# Altium PCB Power_Board.PcbDoc (part 1 of 3)
Units mil, origin at the board's own origin, x right, y up, seen from the top; angles counter-clockwise.
Board outline 5980 x 2140 mil, 4 copper layers (Top Layer, Layer 1, Layer 2, Bottom Layer), stack 23.756 mil thick; 228 components, 110 nets, 609 pads, 397 vias.
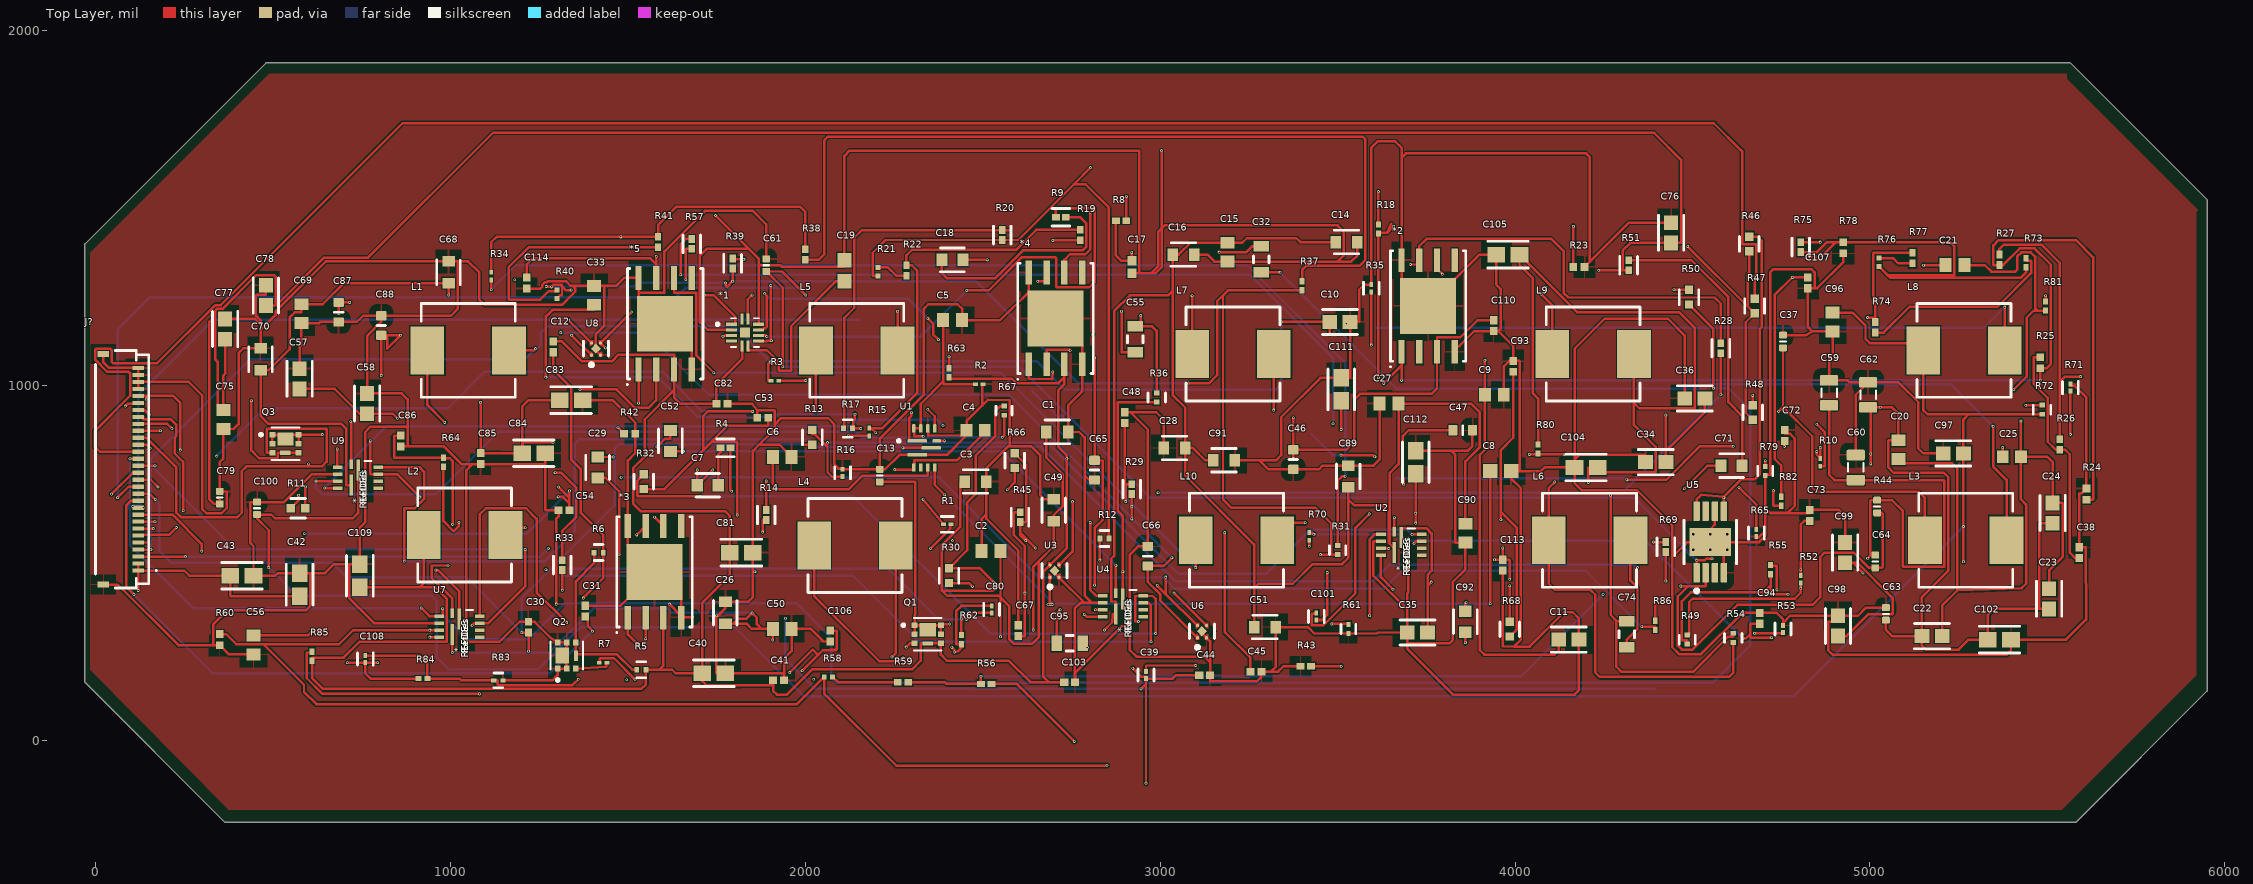
[diagram p0: Top Layer view]
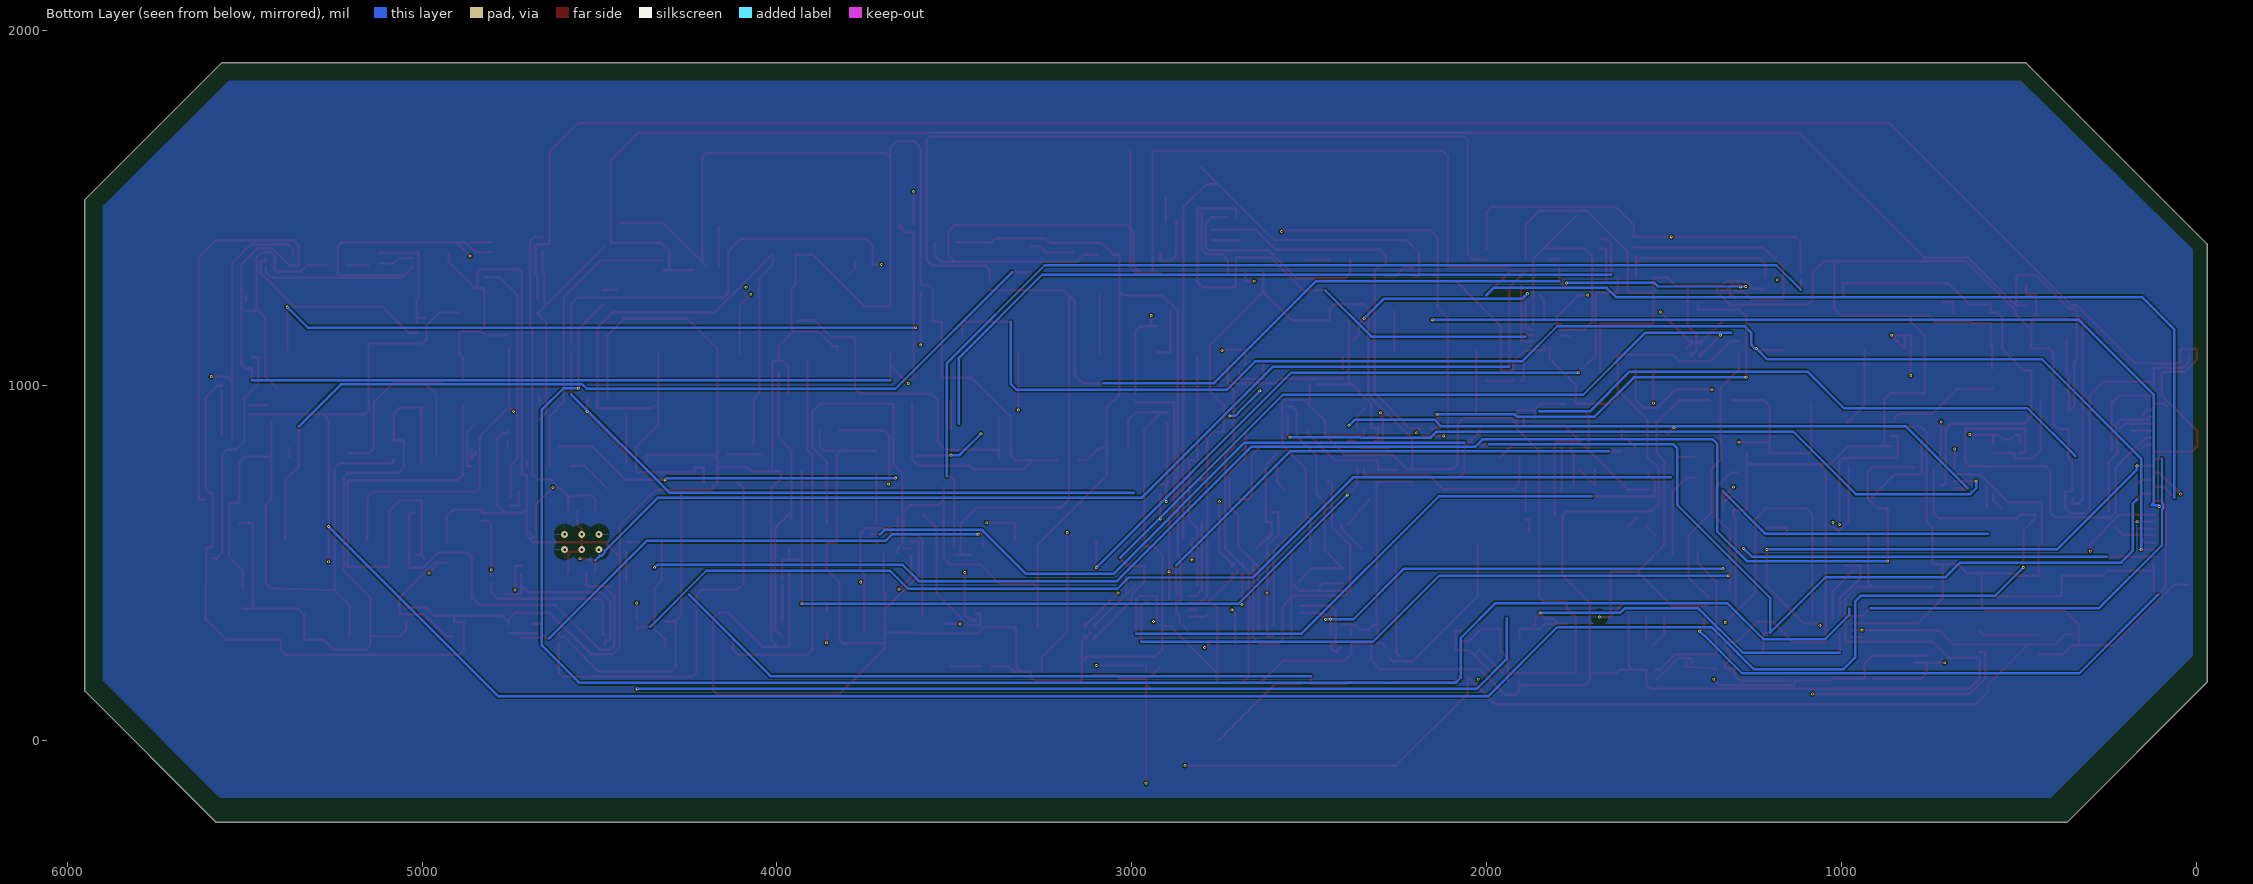
[diagram p1: Bottom Layer view, seen from below]
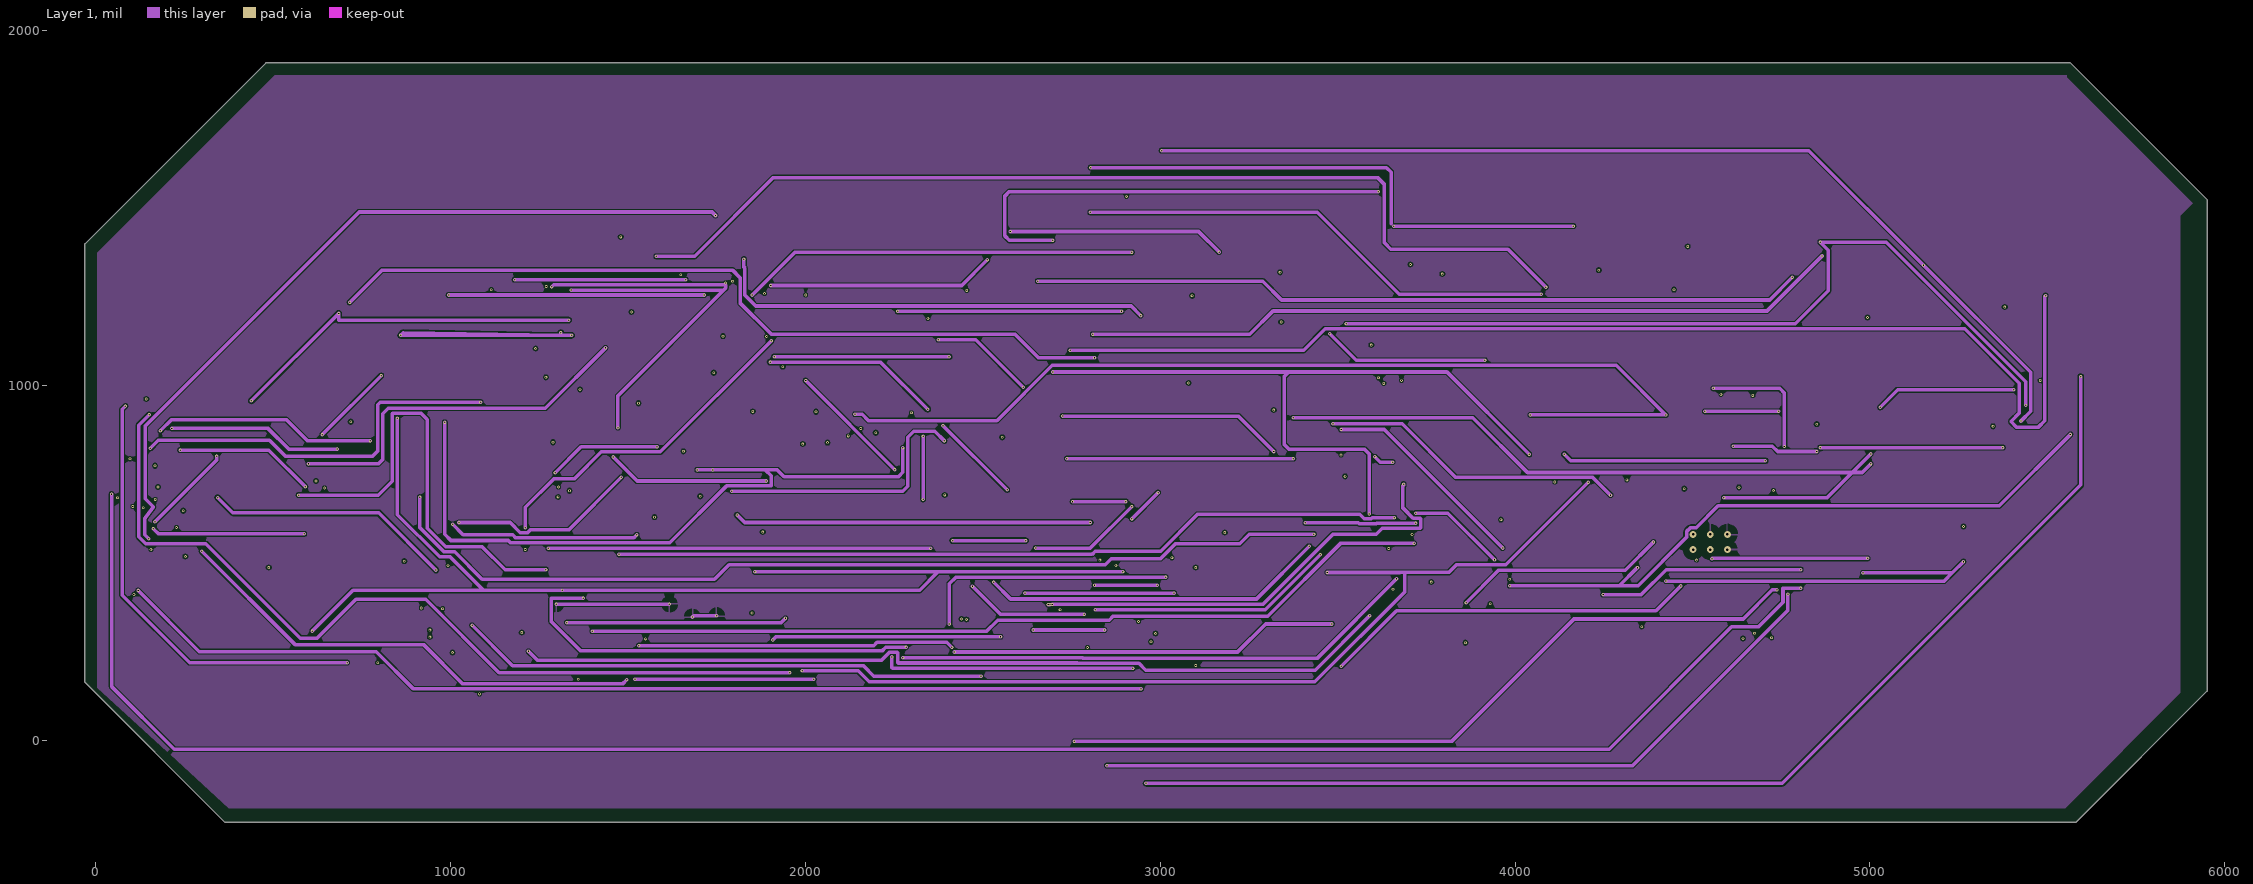
[diagram p2: Layer 1]
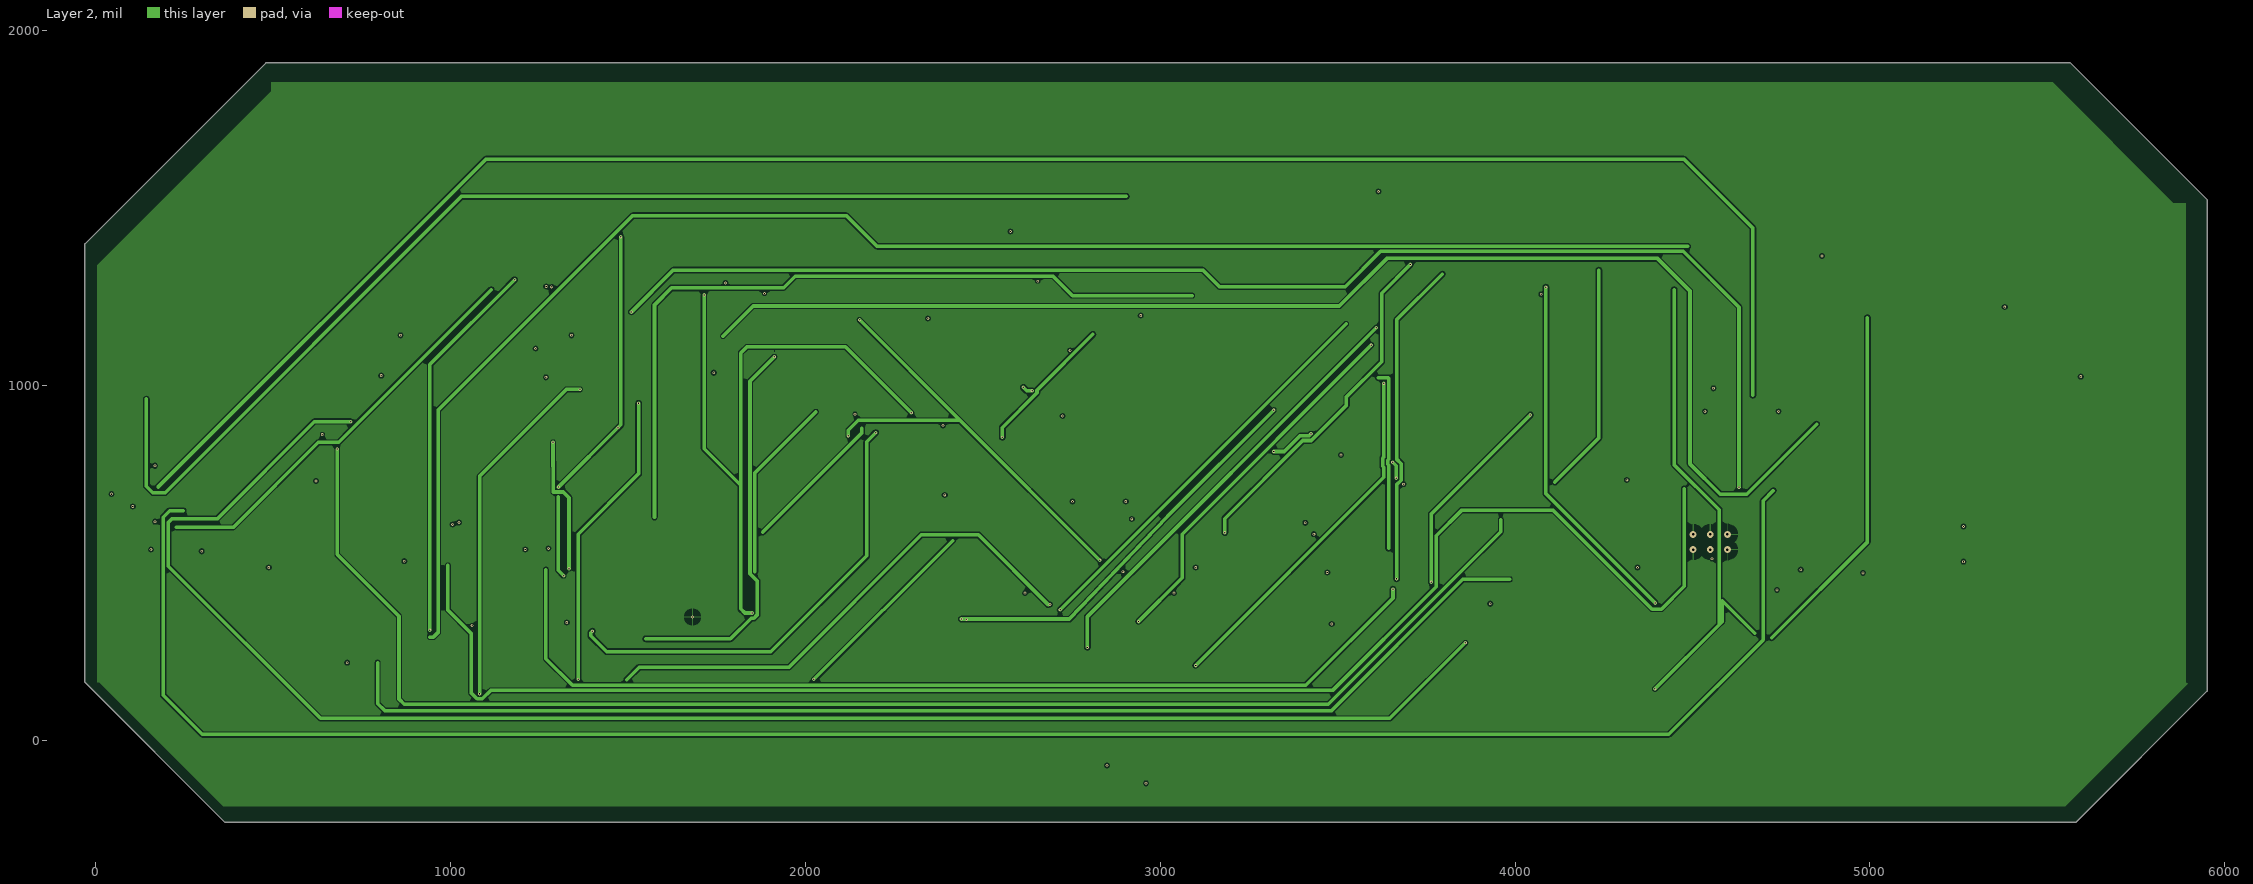
[diagram p3: Layer 2]
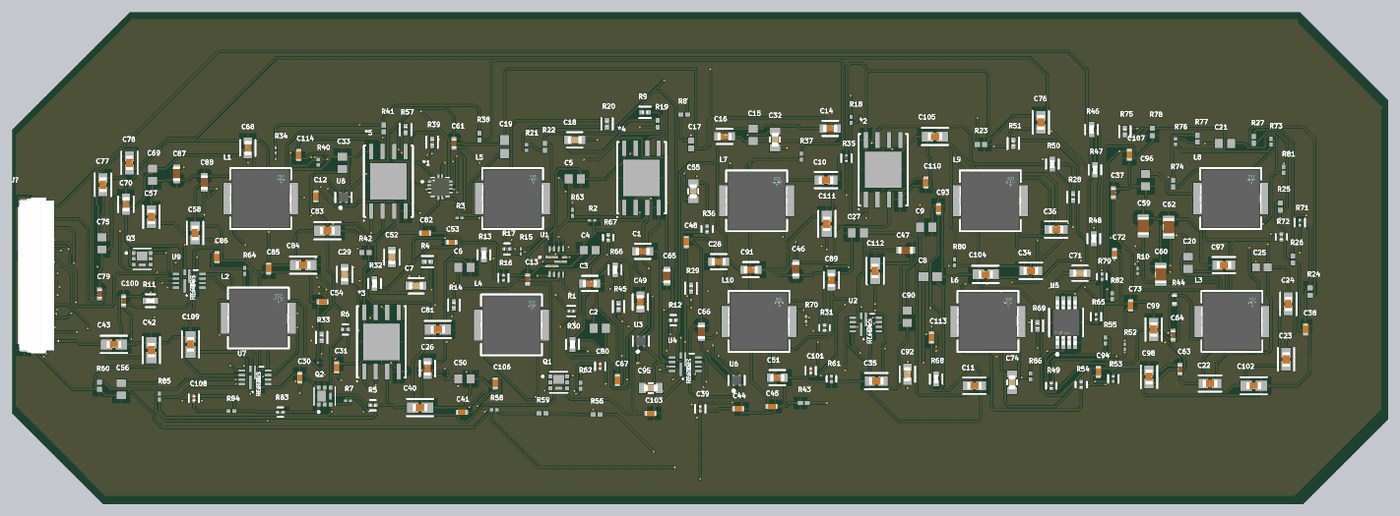
[diagram p6: 3D render of the assembled board from above, using the file's embedded part models]

## Layer stack, top to bottom
Top Solder: solder mask 0.4, Solder Resist, Dk 3.5
Top Layer: signal copper 1.4
Dielectric 2: prepreg 2.8, PP-006, Dk 4.1
Layer 1: signal copper 1.378
Dielectric 1: dielectric 12.6, FR-4, Dk 4.8
Layer 2: signal copper 1.378
Dielectric 3: prepreg 2.8, PP-006, Dk 4.1
Bottom Layer: signal copper 1.4
Bottom Solder: solder mask 0.4, Solder Resist, Dk 3.5

## Board outline
-30,1400 480,1910 5565,1910 5950,1525 5950,140 5580,-230 365,-230 -30,165

## Design rules (kind name [scope] priority, off if disabled: settings)
AssemblyTestPointUsage [All] p1: isadvanced=TRUE
AssemblyTestpoint [All] p1: isadvanced=TRUE testpointundercomponent=TRUE minsize=40 maxsize=100 preferedsize=60 minholesize=0 maxholesize=40 preferedholesize=32 testpointgrid=1 usegrid=TRUE gridtolerance=0.01 allowsidetop=TRUE allowsidebottom=TRUE
Clearance Clearance_3 [All] p1 off: isadvanced=TRUE gap=1 ignorepadtopadclearanceinfootprint=FALSE
Clearance Clearance_1 [(ExistsOnLayer('Layer 1') Or ExistsOnLayer('Layer 2')) vs (ExistsOnLayer('Layer 1') Or ExistsOnLayer('Layer 2'))] p2: gap=3.94 ignorepadtopadclearanceinfootprint=FALSE except(10: Hole-Hole) sourcerule=40 cellrowname=All cellrowtype=0 cellcolname=All cellcoltype=0 innerlayers=TRUE
Clearance Clearance_2 [(ExistsOnLayer('Top Layer') Or ExistsOnLayer('Bottom Layer')) vs (ExistsOnLayer('Top Layer') Or ExistsOnLayer('Bottom Layer'))] p3: gap=3.94 ignorepadtopadclearanceinfootprint=FALSE except(10: Hole-Hole) sourcerule=40 cellrowname=All cellrowtype=0 cellcolname=All cellcoltype=0 outerlayers=TRUE
Clearance [All] p4: gap=10 ignorepadtopadclearanceinfootprint=FALSE ismatrix=TRUE
ComponentClearance [All] p1: isadvanced=TRUE gap=10 collisioncheckmode=3 verticalgap=10 showdistances=FALSE
DiffPairsRouting [All] p1: maxlimit=39.37 minlimit=3.94 mostfreqgap=10 toplayer_prefgap=5 toplayer_minwidth=3.94 toplayer_maxwidth=59.06 toplayer_prefwidth=39.37 midlayer1_mingap=10 midlayer1_maxgap=10 midlayer1_minwidth=15 midlayer1_maxwidth=15 midlayer1_prefwidth=15 midlayer2_mingap=10 midlayer2_maxgap=10 midlayer2_minwidth=15 midlayer2_maxwidth=15 midlayer2_prefwidth=15 bottomlayer_prefgap=5 bottomlayer_minwidth=3.94 bottomlayer_maxwidth=59.06 bottomlayer_prefwidth=39.37 maxuncoupledlength=500
FabricationTestPointUsage [All] p1: isadvanced=TRUE valid=0 allowmultiple=FALSE
FabricationTestpoint [All] p1: isadvanced=TRUE side=3 testpointundercomponent=TRUE minsize=40 maxsize=100 preferedsize=60 minholesize=0 maxholesize=40 preferedholesize=32 testpointgrid=1 allowsidetop=TRUE allowsidebottom=TRUE usegrid=TRUE gridtolerance=0.01
FanoutControl Fanout_BGA [IsBGA] p1: isadvanced=TRUE bgadir=Out bgaviamode=Centered fanoutstyle=Auto fanoutdirection=Alternating viagrid=1 // Fanout_BGA (Default Rule)
FanoutControl Fanout_LCC [IsLCC] p2: isadvanced=TRUE bgadir=Out bgaviamode=Centered fanoutstyle=Auto fanoutdirection=Alternating viagrid=1 // Fanout_LCC (Default Rule)
FanoutControl Fanout_SOIC [IsSOIC] p3: isadvanced=TRUE bgadir=Out bgaviamode=Centered fanoutstyle=Auto fanoutdirection=Alternating viagrid=1 // Fanout_SOIC (Default Rule)
FanoutControl Fanout_Small [(CompPinCount < 5)] p4: isadvanced=TRUE bgadir=Out bgaviamode=Centered fanoutstyle=Auto fanoutdirection=OutThenIn viagrid=1 // Fanout_Small (Default Rule)
FanoutControl Fanout_Default [All] p5: isadvanced=TRUE bgadir=Out bgaviamode=Centered fanoutstyle=Auto fanoutdirection=Alternating viagrid=1 // Fanout_Default (Default Rule)
Height [All] p1: isadvanced=TRUE minheight=0 maxheight=1000 prefheight=500
HoleSize [All] p1: isadvanced=TRUE absolutevalues=TRUE maxlimit=100 minlimit=1 maxpercent=80.000 minpercent=20.000
HoleToHoleClearance [All] p1 off: isadvanced=TRUE gap=10 allowstackedmicrovias=TRUE
LayerPairs [All] p1: isadvanced=TRUE enforce=TRUE
MinimumSolderMaskSliver [All] p1 off: isadvanced=TRUE minsoldermaskwidth=10
NetAntennae [All] p1 off: isadvanced=TRUE netantennaetolerance=0
PasteMaskExpansion [All] p1: isadvanced=TRUE expansion=0
PlaneClearance [All] p1: isadvanced=TRUE clearance=20
PlaneConnect [All] p1: isadvanced=TRUE planeconnectstyle=Relief reliefexpansion=20 reliefentries=4 reliefconductorwidth=10 reliefairgap=10
PolygonConnect [All] p1: connectstyle=Relief reliefconductorwidth=3.94 reliefentries=4 polygonreliefangle="90 Angle" airgapwidth=19.68
RoutingCorners [All] p1: isadvanced=TRUE cornerstyle=45-Degree minsetback=100 maxsetback=100
RoutingPriority [All] p1: isadvanced=TRUE routingpriority=0
RoutingVias [All] p1: holewidth=3.94 width=7.87 viastyle="Through Hole" minholewidth=3.94 minwidth=7.87 maxholewidth=3.94 maxwidth=7.87
SMDNeckDown [All] p1 off: isadvanced=TRUE percent=50.000
ShortCircuit [All] p1: isadvanced=TRUE allowed=FALSE
SilkToSilkClearance [All] p1 off: isadvanced=TRUE silktosilkclearance=10
SilkToSolderMaskClearance [IsPad] p1 off: isadvanced=TRUE minsilkscreentomaskgap=10 clearancetoexposedcopper=TRUE
SolderMaskExpansion [All] p1: isadvanced=TRUE expansion=0 istentingtop=FALSE
SupplyNets "Schematic Supply Nets_1" [InNet('GND')] p1: isadvanced=TRUE voltage=0.000
SupplyNets "Schematic Supply Nets" [InNet('VCC_MCU')] p2: isadvanced=TRUE voltage=0.000
UnRoutedNet [All] p1: isadvanced=TRUE
UnpouredPolygon [All] p1: isadvanced=TRUE
Width [All] p1: maxlimit=10 minlimit=1 preferedwidth=10 toplayer_maxwidth=7 toplayer_prefwidth=7 midlayer1_minwidth=10 midlayer2_minwidth=10 bottomlayer_maxwidth=7 bottomlayer_prefwidth=7 minimp=50.000000 maximp=50.000000 favimp=50.000000
3 further rules are at their usual default settings.

## Classes and differential pairs
component class VDDQ_1V1: *3 C80 C81 C82 C83 C84 C85 C86 L7 R61 R62 R63 R64
component class VDDIO_C: C87 C88 Q3 R65 U8
component class VDDIO_1V8: C46 C47 C48 R29 U3
component class VDDCPU_B: C89 C90 C91 C92 C93 C94 C95 C96 C97 C98 C99 C100 L8 R66 R67 R68 R69 R70 R71 R72 R73 R74 R75 R76 R77 R78 U9
component class VDDCPU_A: C68 C69 C70 C71 C72 C73 C74 C75 C76 C77 C78 C79 L6 R46 R47 R48 R49 R50 R51 R52 R53 R54 R55 R56 R57 R58 R59 R60 U7
component class VDDAO_3V3: *1 C14 C15 C16 C17 C18 C19 C20 C21 C22 C23 C24 C25 L2 R8 R9 R10
component class VDDAO_1V8: C59 C60 C61 C62 C63 C64 R43 R44 U5
component class VDD_NPU: *2 C38 C39 C40 C41 C42 C43 C44 C45 L4 R24 R25 R26 R27 R28
component class VDD_GPU: C49 C50 C51 C52 C53 C54 C55 C56 C57 C58 L5 R30 R31 R32 R33 R34 R35 R36 R37 R38 R39 R40 R41 R42 U4
component class VDD_EE: C26 C27 C28 C29 C30 C31 C32 C33 C34 C35 C36 C37 L3 R11 R12 R13 R14 R15 R16 R17 R18 R19 R20 R21 R22 R23 U2
component class VDD_DDR: *4 C101 C102 C103 C104 C105 C106 C107 L9 R79 R80 R81 R82
component class VCC5V: C1 C2 C3 C4 C5 C6 C7 C8 C9 C10 C11 L1 R1 R2 R3 R4 U1
component class U_SY8003ADFC_4: *5 C108 C109 C110 C111 C112 C113 C114 L10 R83 R84 R85 R86
component class Supply_Source: C12 C13 J? Q1 Q2 R5 R6 R7
component class AVDD08_HDMITX_LDO: C65 C66 C67 R45 U6

## Components (designator, comment, footprint, x,y, rotation, side; value= is the part's Value field where it differs from the comment)
*1 "NB680GD-Z" NB680GD-Z-Footprint-1 1830,1150 r0 top
*2 "SY8003ADFC" SON127P750X265-8N 3755,1225 r90 top
*3 "SY8003ADFC" SON127P750X265-8N 1575,475.87 r90 top
*4 "SY8003ADFC" SON127P750X265-8N 2705,1190 r90 top
*5 "SY8003ADFC" SON127P750X265-8N 1605,1175 r90 top
C1 "GRM188R61A106KE69D" FP-GRM18-0_15-MFG 2710,870 r0 top value=10uF
C2 "VJ0603Y104KXJAP" CAPC1608X92X38NL15T08 2523.43,535 r0 top
C3 "GRM188R61A106KE69D" FP-GRM18-0_15-MFG 2480,730 r0 top value=10uF
C4 "0603YD105MAT2A" CAPC1608X90X35LL15T15 2480,875 r0 top value=1µF
C5 "VJ0603Y102MXXAC" CAPC1608X92X38NL15T08 2415,1185 r0 top
C6 "VJ0603Y104KXJAP" CAPC1608X92X38NL15T08 1935,800 r0 top
C7 "CC0603KRX5R9BB224" FP-CC0603-DA-MFG 1725,720 r0 top value="220 nF"
C8 "0603YD105MAT2A" CAPC1608X90X35NL15T15 3959.53,760 r0 top
C9 "VJ0603Y104KXJAP" CAPC1608X92X38NL15T08 3941.57,975 r180 top
C10 "GRM186R60J226ME15D" FP-GRM186-0_2-IPC_B 3506.44,1180 r0 top
C11 "GRM186R60J226ME15D" FP-GRM186-0_2-IPC_B 4151.44,285 r0 top
C12 "Capacitor 0.1 uF +/- 5% 16 V 0402" CAPC1005X56X25LL10T15 1290,1110 r90 top value=100nF
C13 "Capacitor 10µF +/-40% 6.3V 0402" CAPC0402(1005)60_L 2210,747.28 r90 top value=10µF
C14 "GRM188R61A106KE69D" FP-GRM18-0_15-MFG 3525,1405 r0 top value=10uF
C15 "VJ0603Y104KXJAP" CAPC1608X92X38NL15T08 3190,1376.57 r90 top
C16 "GRM188R61A106KE69D" FP-GRM18-0_15-MFG 3065.51,1370 r0 top value=10uF
C17 "0402ZC101KAT2A" CAPC1005X56X25NL10T15 2920,1335 r90 top
C18 "CC0603KRX5R9BB224" FP-CC0603-DA-MFG 2414.53,1355 r0 top value="220 nF"
C19 "0603YD105MAT2A" CAPC1608X90X35NL15T15 2110,1324.53 r90 top
C20 "VJ0603Y104KXJAP" CAPC1608X92X38NL15T08 5080,820 r90 top
C21 "VJ0603Y104KXJAP" CAPC1608X92X38NL15T08 5240,1340 r0 top
C22 "GRM186R60J226ME15D" FP-GRM186-0_2-IPC_B 5175,295 r0 top
C23 "GRM186R60J226ME15D" FP-GRM186-0_2-IPC_B 5505,400 r90 top
C24 "GRM186R60J226ME15D" FP-GRM186-0_2-IPC_B 5515,641.44 r90 top
C25 "0603YD105MAT2A" CAPC1608X90X35LL15T15 5400,800 r180 top value=1µF
C26 "GRM188R61A106KE69D" FP-GRM18-0_15-MFG 1775,360.51 r90 top value=10uF
C27 "VJ0603Y104KXJAP" CAPC1608X92X38NL15T08 3645,950 r0 top
C28 "GRM188R61A106KE69D" FP-GRM18-0_15-MFG 3040,825 r180 top value=10uF
C29 "CC0603KRX5R9BB224" FP-CC0603-DA-MFG 1415,770 r90 top value="220 nF"
C30 "Capacitor 1 uF +/- 10% 6.3 V 0402" CAPC1005X55X25LL05T10 1220,320 r90 top value=1µF
C31 "Capacitor 0.1 uF +/- 5% 16 V 0402" CAPC1005X56X25LL10T15 1380,365 r90 top value=100nF
C32 "CGA3E3C0G2E221JT0Y0N" FP-CGA3E-0_3-0_1-IPC_B 3285,1356.42 r90 top
C33 "VJ0603Y104KXJAP" CAPC1608X92X38NL15T08 1405,1255 r270 top
C34 "GRM186R60J226ME15D" FP-GRM186-0_2-IPC_B 4396.44,785 r180 top
C35 "GRM186R60J226ME15D" FP-GRM186-0_2-IPC_B 3725,305 r180 top
C36 "GRM186R60J226ME15D" FP-GRM186-0_2-IPC_B 4506.44,965 r180 top
C37 "Capacitor 47nF +/-20% 50V 0402" CAPC0402(1005)60_L 4755,1125 r90 top value=47nF
C38 "Capacitor 0.1 uF +/- 5% 16 V 0402" CAPC1005X56X25LL10T15 5590,530 r90 top value=100nF
C39 "GRM0335C1E220FA01D" FP-GRM033-0_03-IPC_C 2960,185 r90 top
C40 "GRM186R60J226ME15D" FP-GRM186-0_2-IPC_A 1742.5,190 r0 top value=22µF
C41 "Capacitor 0.1 uF +/- 5% 16 V 0402" CAPC1005X56X25LL10T15 1924.65,170 r180 top value=100nF
C42 "GRM186R60J226ME15D" FP-GRM186-0_2-IPC_A 575,440 r90 top value=22µF
C43 "GRM186R60J226ME15D" FP-GRM186-0_2-IPC_A 412.5,465 r0 top value=22µF
C44 "Capacitor 0.1 uF +/- 5% 16 V 0402" CAPC1005X56X25LL10T15 3125.35,185 r180 top value=100nF
C45 "Capacitor 0.1 uF +/- 5% 16 V 0402" CAPC1005X56X25LL10T15 3269.65,195 r180 top value=100nF
C46 "Capacitor 4.7µF +/-20% 10V 0603" CAPC0603(1608)100_L 3375,792.44 r90 top value=4.7µF
C47 "Capacitor 4.7µF +/-20% 10V 0603" CAPC0603(1608)100_L 3852.44,875 r0 top value=4.7µF
C48 "Capacitor 0.1 uF +/- 5% 16 V 0402" CAPC1005X56X25LL10T15 2900,910.35 r90 top value=100nF
C49 "GRM188R61A106KE69D" FP-GRM18-0_15-MFG 2700,649.49 r90 top value=10uF
C50 "VJ0603Y104KXJAP" CAPC1608X92X38NL15T08 1935,315 r180 top
C51 "GRM188R61A106KE69D" FP-GRM18-0_15-MFG 3295,320 r0 top value=10uF
C52 "CC0603KRX5R9BB224" FP-CC0603-DA-MFG 1620,845 r90 top value="220 nF"
C53 "Capacitor 1 uF +/- 10% 6.3 V 0402" CAPC1005X55X25LL05T10 1880,910 r180 top value=1µF
C54 "Capacitor 0.1 uF +/- 5% 16 V 0402" CAPC1005X56X25LL10T15 1320,650 r180 top value=100nF
C55 "CGA3E3C0G2E221JT0Y0N" FP-CGA3E-0_3-0_1-IPC_B 2930,1131.42 r90 top
C56 "VJ0603Y104KXJAP" CAPC1608X92X38NL15T08 445,270 r90 top
C57 "GRM186R60J226ME15D" FP-GRM186-0_2-IPC_B 575,1020 r90 top
C58 "GRM186R60J226ME15D" FP-GRM186-0_2-IPC_B 765,950 r90 top
C59 "Capacitor 22µF +/-40% 16V 0805" CAPC0805(2012)145_L 4885,980.43 r90 top value=22µF
C60 "Capacitor 22µF +/-40% 16V 0805" CAPC0805(2012)145_L 4960,770 r90 top value=22µF
C61 "Capacitor 100nF +/-20% 25V 0402" CAPC0402(1005)60_L 1890,1340 r90 top value=100nF
C62 "Capacitor 22µF +/-40% 16V 0805" CAPC0805(2012)145_L 4995,975 r90 top value=22µF
C63 "Capacitor 100nF +/-20% 25V 0402" CAPC0402(1005)60_L 5045,357.28 r90 top value=100nF
C64 "Capacitor 22pF +/-10% 50V 0402" CAPC0402(1005)60_L 5015,505 r90 top value=22pF
C65 "Capacitor 4.7µF +/-20% 10V 0603" CAPC0603(1608)100_L 2815,762.56 r90 top value=4.7µF
C66 "Capacitor 4.7µF +/-20% 10V 0603" CAPC0603(1608)100_L 2965,520 r90 top value=4.7µF
C67 "Capacitor 0.1 uF +/- 5% 16 V 0402" CAPC1005X56X25LL10T15 2600,310 r90 top value=100nF
C68 "GRM188R61A106KE69D" FP-GRM18-0_15-MFG 995,1320 r90 top value=10uF
C69 "VJ0603Y104KXJAP" CAPC1608X92X38NL15T08 580,1203.43 r90 top
C70 "GRM188R61A106KE69D" FP-GRM18-0_15-MFG 465,1075 r90 top value=10uF
C71 "CC0603KRX5R9BB224" FP-CC0603-DA-MFG 4610,775 r0 top value="220 nF"
C72 "Capacitor 1 uF +/- 10% 6.3 V 0402" CAPC1005X55X25LL05T10 4760,860 r90 top value=1µF
C73 "Capacitor 0.1 uF +/- 5% 16 V 0402" CAPC1005X56X25LL10T15 4830,635 r90 top value=100nF
C74 "CGA3E3C0G2E221JT0Y0N" FP-CGA3E-0_3-0_1-IPC_B 4315,300 r90 top
C75 "VJ0603Y104KXJAP" CAPC1608X92X38NL15T08 360,905 r90 top
C76 "GRM186R60J226ME15D" FP-GRM186-0_2-IPC_B 4440,1431.44 r90 top
C77 "GRM186R60J226ME15D" FP-GRM186-0_2-IPC_B 365,1160 r90 top
C78 "GRM186R60J226ME15D" FP-GRM186-0_2-IPC_B 480,1255 r90 top
C79 "Capacitor 47nF +/-20% 50V 0402" CAPC0402(1005)60_L 350,685 r90 top value=47nF
C80 "GRM0335C1E220FA01D" FP-GRM033-0_03-IPC_C 2525,369.99 r90 top
C81 "GRM186R60J226ME15D" FP-GRM186-0_2-IPC_A 1820,530 r0 top value=22µF
C82 "Capacitor 0.1 uF +/- 5% 16 V 0402" CAPC1005X56X25LL10T15 1765,950 r180 top value=100nF
C83 "GRM186R60J226ME15D" FP-GRM186-0_2-IPC_A 1340,960 r0 top value=22µF
C84 "GRM186R60J226ME15D" FP-GRM186-0_2-IPC_A 1235,810 r0 top value=22µF
C85 "Capacitor 0.1 uF +/- 5% 16 V 0402" CAPC1005X56X25LL10T15 1085,795 r90 top value=100nF
C86 "Capacitor 0.1 uF +/- 5% 16 V 0402" CAPC1005X56X25LL10T15 860,844.65 r90 top value=100nF
C87 "Capacitor 4.7µF +/-20% 10V 0603" CAPC0603(1608)100_L 685,1207.56 r90 top value=4.7µF
C88 "Capacitor 4.7µF +/-20% 10V 0603" CAPC0603(1608)100_L 805,1170 r90 top value=4.7µF
C89 "GRM188R61A106KE69D" FP-GRM18-0_15-MFG 3530,745 r90 top value=10uF
C90 "VJ0603Y104KXJAP" CAPC1608X92X38NL15T08 3860,585 r90 top
C91 "GRM188R61A106KE69D" FP-GRM18-0_15-MFG 3180,790 r0 top value=10uF
C92 "CC0603KRX5R9BB224" FP-CC0603-DA-MFG 3860,335.47 r90 top value="220 nF"
C93 "Capacitor 1 uF +/- 10% 6.3 V 0402" CAPC1005X55X25LL05T10 3995,1055 r90 top value=1µF
C94 "Capacitor 0.1 uF +/- 5% 16 V 0402" CAPC1005X56X25LL10T15 4690,345 r90 top value=100nF
C95 "CGA3E3C0G2E221JT0Y0N" FP-CGA3E-0_3-0_1-IPC_B 2745,275 r180 top
C96 "VJ0603Y104KXJAP" CAPC1608X92X38NL15T08 4895,1180 r90 top
C97 "GRM186R60J226ME15D" FP-GRM186-0_2-IPC_B 5235,810 r180 top
C98 "GRM186R60J226ME15D" FP-GRM186-0_2-IPC_B 4910,323.56 r90 top
C99 "GRM186R60J226ME15D" FP-GRM186-0_2-IPC_B 4930,530 r90 top
C100 "Capacitor 47nF +/-20% 50V 0402" CAPC0402(1005)60_L 455,655 r90 top value=47nF
C101 "GRM0335C1E220FA01D" FP-GRM033-0_03-IPC_C 3440,349.99 r90 top
C102 "GRM186R60J226ME15D" FP-GRM186-0_2-IPC_A 5365,285 r0 top value=22µF
C103 "Capacitor 0.1 uF +/- 5% 16 V 0402" CAPC1005X56X25LL10T15 2745,165 r180 top value=100nF
C104 "GRM186R60J226ME15D" FP-GRM186-0_2-IPC_A 4200,770 r180 top value=22µF
C105 "GRM186R60J226ME15D" FP-GRM186-0_2-IPC_A 3980,1370 r180 top value=22µF
C106 "Capacitor 0.1 uF +/- 5% 16 V 0402" CAPC1005X56X25LL10T15 2070,295 r90 top value=100nF
C107 "Capacitor 0.1 uF +/- 5% 16 V 0402" CAPC1005X56X25LL10T15 4825,1290.35 r90 top value=100nF
C108 "GRM0335C1E220FA01D" FP-GRM033-0_03-IPC_C 760,230.01 r90 top
C109 "GRM186R60J226ME15D" FP-GRM186-0_2-IPC_A 745,465 r90 top value=22µF
C110 "Capacitor 0.1 uF +/- 5% 16 V 0402" CAPC1005X56X25LL10T15 3940,1169.65 r90 top value=100nF
C111 "GRM186R60J226ME15D" FP-GRM186-0_2-IPC_A 3510,990 r90 top value=22µF
C112 "GRM186R60J226ME15D" FP-GRM186-0_2-IPC_A 3720,785 r90 top value=22µF
C113 "Capacitor 0.1 uF +/- 5% 16 V 0402" CAPC1005X56X25LL10T15 3965,494.65 r90 top value=100nF
C114 "Capacitor 0.1 uF +/- 5% 16 V 0402" CAPC1005X56X25LL10T15 1215,1289.65 r90 top value=100nF
J? "FH34SRJ-30S-0.5SH_99_" FH34SRJ30S05SH99 75,765 r270 top
L1 "IHLP2525CZER1R5M01" FP-IHLP-2525CZ-FP_2_413x3-MFG 1050,1100 r0 top
L2 "IHLP2525CZER1R5M01" FP-IHLP-2525CZ-FP_2_413x3-MFG 1040,580 r0 top
L3 "IHLP2525CZER1R5M01" FP-IHLP-2525CZ-FP_2_413x3-MFG 5270,565 r0 top
L4 "IHLP2525CZER1R5M01" FP-IHLP-2525CZ-FP_2_413x3-MFG 2140,550 r0 top value=14mH
L5 "IHLP2525CZER1R5M01" FP-IHLP-2525CZ-FP_2_413x3-MFG 2145,1100 r0 top
L6 "IHLP2525CZER1R5M01" FP-IHLP-2525CZ-FP_2_413x3-MFG 4210,565 r0 top
L7 "IHLP2525CZER1R5M01" FP-IHLP-2525CZ-FP_2_413x3-MFG 3205,1090 r0 top value=14mH
L8 "IHLP2525CZER1R5M01" FP-IHLP-2525CZ-FP_2_413x3-MFG 5265,1100 r0 top
L9 "IHLP2525CZER1R5M01" FP-IHLP-2525CZ-FP_2_413x3-MFG 4220,1090 r0 top value=14mH
L10 "IHLP2525CZER1R5M01" FP-IHLP-2525CZ-FP_2_413x3-MFG 3215,565 r0 top value=14mH
Q1 "SSM6J507NU,LF(T" TRANS_SSM6J507NU,LF(T 2345,300 r0 top
Q2 "SSM6J507NU,LF(T" TRANS_SSM6J507NU,LF(T 1327.8,240 r90 top
Q3 "SSM6J507NU,LF(T" TRANS_SSM6J507NU,LF(T 535,837.2 r0 top
R1 "RMCF0201JT4K70" FP-RMCF0201-IPC_C 2400,610 r0 top
R2 "CRG0201F100K" RESC0603X26X15LL03T05 2490,1005 r0 top
R3 "CRG0201F100K" RESC0603X26X15LL03T05 1914.17,1015 r0 top
R4 "RMCF0201JT3R30" FP-RMCF0201-IPC_A 1775,825 r0 top
R5 "RMCF0201JT47K0" FP-RMCF0201-MFG 1537.8,200 r0 top
R6 "RT0201BRE0710KL" FP-RT0201-MFG 1417.8,530 r0 top value=10KΩ
R7 "CPF0201D1K0E1" RESC0603X28X15LL05T05 1430,220 r0 top
R8 "MCRE000140" RESC0603X26X15ML03T05 2890,1465 r0 top
R9 "RMCF0201JT3R30" FP-RMCF0201-IPC_A 2720,1475 r0 top
R10 "CRG0201F100K" RESC0603X26X15LL03T05 4860,784.17 r90 top
R11 "CRCW04021R21FKED" FP-CRCW0402-e3-MFG 570.67,655 r0 top
R12 "RMCF0201JT5K60" FP-RMCF0201-MFG 2842.8,570 r180 top
R13 "CRCW04021R21FKED" FP-CRCW0402-e3-MFG 2020,855 r90 top
R14 "RMCF0201JT3R30" FP-RMCF0201-IPC_A 1890,636.05 r90 top
R15 "CRCW020151K0FNED" RESC0603X28X15LL05T05 2180,870 r90 top
R16 "RT0201BRE0710KL" FP-RT0201-IPC_C 2105,755 r90 top value=10k
R17 "AF0201FR-07499KL" FP-AF0201-MFG 2120,880 r180 top
R18 "CRCW02015K60JNED" RESC0603X28X15NL05T05 3615,1442.2 r90 top
R19 "CRCW020151K1FNED" RESC0603X28X15ML05T05 2775,1425 r90 top
R20 "AF0201FR-07499RL" FP-AF0201-IPC_A 2555,1425 r90 top
R21 "300K 1% 0201(0603)" RESC0201(0603)_L 2205,1321.81 r90 top value="300000.00 Ohm"
R22 "CRCW0201160KFNED" RESC0603X28X15ML05T05 2285,1325 r90 top
R23 "137K 1% 0201(0603)" RESC0201(0603)_M 4180,1335 r180 top value="137000.00 Ohm"
R24 "CRCW0201137KFKED" RESC0201(0603)_M 5610,695 r90 top value=137k
R25 "RC0201FR-07300KL" RESC0201(0603)_M 5480,1065 r90 top value=300k
R26 "CRCW0201160KFNED" RESC0603X28X15ML05T05 5535,835 r90 top value=160k
R27 "CRCW020151K1FNED" RESC0603X28X15ML05T05 5365,1355.24 r90 top value=51.1k
R28 "RMCF0201JT4K70" FP-RMCF0201-IPC_A 4580,1106.05 r90 top value=4.7k
R29 "RMCF0201JT4K70" FP-RMCF0201-IPC_A 2920,708.95 r90 top value=4.7k
R30 "CRCW04021R21FKED" FP-CRCW0402-e3-MFG 2405,465 r90 top
R31 "RMCF0201JT5K60" FP-RMCF0201-MFG 3500,537.2 r90 top
R32 "CRCW04021R21FKED" FP-CRCW0402-e3-MFG 1545,730 r90 top
R33 "RMCF0201JT3R30" FP-RMCF0201-IPC_A 1315,495 r90 top
R34 "CRCW020151K0FNED" RESC0603X28X15LL05T05 1115,1309.17 r90 top
R35 "RT0201BRE0710KL" FP-RT0201-IPC_C 3595,1275 r90 top value=10k
R36 "AF0201FR-07499KL" FP-AF0201-MFG 2990,967.2 r90 top
R37 "CRCW02015K60JNED" RESC0603X28X15NL05T05 3400,1282.2 r90 top
R38 "CRCW020151K1FNED" RESC0603X28X15ML05T05 2000,1370 r90 top
R39 "AF0201FR-07499RL" FP-AF0201-IPC_A 1795,1345 r90 top
R40 "300K 1% 0201(0603)" RESC0201(0603)_L 1300,1258.19 r90 top value="300000.00 Ohm"
R41 "CRCW0201160KFNED" RESC0603X28X15ML05T05 1585,1405 r90 top
R42 "137K 1% 0201(0603)" RESC0201(0603)_M 1505,865 r180 top value="137000.00 Ohm"
R43 "CRCW0201160KFNED" RESC0603X28X15ML05T05 3410,210 r180 top value=160k
R44 "Resistor 200K +/-1 % 0402 63 mW" RESC0402(1005)_L 5020,660 r90 top value=200k
R45 "RMCF0201JT4K70" FP-RMCF0201-IPC_A 2605,630 r90 top value=4.7k
R46 "CRCW04021R21FKED" FP-CRCW0402-e3-MFG 4660,1400 r90 top
R47 "CRCW04021R21FKED" FP-CRCW0402-e3-MFG 4675,1225 r90 top
R48 "CRCW04021R21FKED" FP-CRCW0402-e3-MFG 4670,925 r90 top
R49 "RMCF0201JT5K60" FP-RMCF0201-MFG 4485,285 r90 top
R50 "CRCW04021R21FKED" FP-CRCW0402-e3-MFG 4490,1250 r90 top
R51 "RMCF0201JT3R30" FP-RMCF0201-IPC_A 4320,1340 r90 top
R52 "CRCW020151K0FNED" RESC0603X28X15LL05T05 4805,455 r90 top
R53 "RT0201BRE0710KL" FP-RT0201-IPC_C 4755,314.99 r90 top value=10k
R54 "AF0201FR-07499KL" FP-AF0201-MFG 4615,290 r90 top
R55 "CRCW02015K60JNED" RESC0603X28X15NL05T05 4720,482.2 r90 top
R56 "CRCW020151K1FNED" RESC0603X28X15ML05T05 2509.76,160 r180 top
R57 "AF0201FR-07499RL" FP-AF0201-IPC_A 1680,1400 r90 top
R58 "300K 1% 0201(0603)" RESC0201(0603)_L 2065,180 r0 top value="300000.00 Ohm"
R59 "CRCW0201160KFNED" RESC0603X28X15ML05T05 2275,165 r0 top
R60 "137K 1% 0201(0603)" RESC0201(0603)_M 350,285 r90 top value="137000.00 Ohm"
R61 "RC0603F124CS" FP-RC0603-MFG 3530,315 r90 top
R62 "CRG0201F100K" RESC0603X26X15NL03T05 2440,285 r90 top value=100k
R63 "CRG0201F100K" RESC0603X26X15NL03T05 2405,1037.2 r90 top value=100k
R64 "MCRE000140" RESC0603X26X15NL03T05 980,785 r90 top value=1k
R65 "RT0201BRE0710KL" FP-RT0201-IPC_C 4680,585 r90 top value=10k
R66 "CRCW04021R21FKED" FP-CRCW0402-e3-MFG 2590,789.33 r90 top
R67 "RMCF0201JT5K60" FP-RMCF0201-MFG 2560,930 r90 top
R68 "CRCW04021R21FKED" FP-CRCW0402-e3-MFG 3985,314.33 r90 top
R69 "RMCF0201JT3R30" FP-RMCF0201-IPC_A 4425,546.05 r90 top
R70 "CRCW020151K0FNED" RESC0603X28X15LL05T05 3420,575.83 r90 top
R71 "RT0201BRE0710KL" FP-RT0201-IPC_C 5565,995 r90 top value=10k
R72 "AF0201FR-07499KL" FP-AF0201-MFG 5485,932.8 r90 top
R73 "CRCW02015K60JNED" RESC0603X28X15NL05T05 5440,1347.2 r90 top
R74 "CRCW020151K1FNED" RESC0603X28X15ML05T05 5015,1165 r90 top
R75 "AF0201FR-07499RL" FP-AF0201-IPC_A 4805,1391.05 r90 top
R76 "300K 1% 0201(0603)" RESC0201(0603)_L 5025,1348.19 r90 top value="300000.00 Ohm"
R77 "CRCW0201160KFNED" RESC0603X28X15ML05T05 5120,1360 r90 top
R78 "137K 1% 0201(0603)" RESC0201(0603)_M 4925,1389.25 r90 top value="137000.00 Ohm"
R79 "RC0603F124CS" FP-RC0603-MFG 4705,760 r90 top
R80 "CRG0201F100K" RESC0603X26X15NL03T05 4065,822.2 r90 top value=100k
R81 "CRG0201F100K" RESC0603X26X15NL03T05 5495,1225 r90 top value=100k
R82 "MCRE000140" RESC0603X26X15NL03T05 4750,675 r90 top value=1k
R83 "RC0603F124CS" FP-RC0603-MFG 1135,170 r180 top
R84 "CRG0201F100K" RESC0603X26X15NL03T05 922.8,175 r180 top value=100k
R85 "CRG0201F100K" RESC0603X26X15NL03T05 610,237.8 r90 top value=100k
R86 "MCRE000140" RESC0603X26X15NL03T05 4395,325 r90 top value=1k
U1 "NB679GD-Z" NB679GD-Z-Footprint-1 2340.16,820.12 r0 top
U2 "MP8756GD-Z" QFN-12_MP8756_MNP 3679.69,551.65 r90 top
U3 "NCP177AMX120TCG" FP-711AJ-MFG 2702.2,479.06 r0 top
U4 "MP8756GD-Z" QFN-12_MP8756_MNP 2895,378.35 r90 top
U5 "TLV76701DGNR" FP-DGN0008G-MFG 4550,560 r90 top
U6 "NCP177AMX120TCG" FP-711AJ-MFG 3117.8,308.5 r0 top
U7 "MP8756GD-Z" QFN-12_MP8756_MNP 1025.32,321.65 r90 top
U8 "NCP177AMX120TCG" FP-711AJ-MFG 1410,1105 r0 top
U9 "MP8756GD-Z" QFN-12_MP8756_MNP 739.68,741.65 r90 top

## Footprints (in the part's own frame and the unit in brackets; to place one, negate y for a bottom-side part, rotate by r counter-clockwise, add the part's x,y. Pads: shape width x height; smd on the part's side, far side on the other; paste and mask are expansions set on the pad)
CAPC0402(1005)60_L [mm] "Chip Capacitor, Body 1.0x0.5mm, Height 0.6mm, IPC High Density"
  rrect25% 0.5x0.55 smd: 1(-0.45,0) 2(0.45,0)
  silkscreen extent 0,-0.2 0,0.2, body extent -0.5,-0.25 0.5,0.25, height 0.6
CAPC0603(1608)100_L [mm] "Chip Capacitor, Body 1.6x0.8mm, Height 1.0mm, IPC High Density"
  rrect25% 0.66x0.76 smd: 1(-0.7,0) 2(0.7,0)
  silkscreen extent 0,-0.3 0,0.3, body extent -0.8,-0.4 0.8,0.4, height 0.95
CAPC0805(2012)145_L [mm] "Chip Capacitor, Body 2.0x1.2mm, Height 1.45mm, IPC High Density"
  rrect25% 0.76x1.3 smd: 1(-0.9,0) 2(0.89,0)
  silkscreen extent -0.3,-0.55 0.3,0.55, body extent -1,-0.6 1,0.6, height 1.45
CAPC1005X55X25LL05T10 [mm] "Chip Capacitor, 2-Leads, Body 1.05x0.55mm, IPC High Density"
  rect 0.56x0.52 smd: 1(-0.39,0) 2(0.39,0)
  body extent -0.53,-0.28 0.53,0.28, height 0.55
CAPC1005X56X25LL10T15 [mm] "Chip Capacitor, 2-Leads, Body 1.10x0.60mm, IPC High Density"
  rect 0.58x0.54 smd: 1(-0.39,0) 2(0.39,0)
  body extent -0.55,-0.3 0.55,0.3, height 0.56
CAPC1005X56X25NL10T15 [mm] "Chip Capacitor, 2-Leads, Body 1.00x0.50mm, IPC Medium Density"
  rect 0.68x0.64 smd: 1(-0.44,0) 2(0.44,0)
  body extent -0.55,-0.3 0.55,0.3, height 0.56
CAPC1608X90X35LL15T15 [mm] "Chip Capacitor, 2-Leads, Body 1.60x0.81mm, IPC High Density"
  rect 0.85x0.9 smd: 1(-0.65,0) 2(0.65,0)
  body extent -0.88,-0.48 0.87,0.48, height 0.9
CAPC1608X90X35NL15T15 [mm] "Chip Capacitor, 2-Leads, Body 1.60x0.81mm, IPC Medium Density"
  rect 1.05x1 smd: 1(-0.75,0) 2(0.75,0)
  body extent -0.88,-0.48 0.87,0.48, height 0.9
CAPC1608X92X38NL15T08 [mm] "Chip Capacitor, 2-Leads, Body 1.60x0.80mm, IPC Medium Density"
  rect 0.85x1 smd: 1(-0.675,0) 2(0.675,0)
  body extent -0.87,-0.48 0.87,0.47, height 0.92
FH34SRJ30S05SH99 [mm]
  rect 0.3x0.8 smd: 1(7.25,1.15) 2(6.75,1.15) 3(6.25,1.15) 4(5.75,1.15) 5(5.25,1.15) 6(4.75,1.15) 7(4.25,1.15) 8(3.75,1.15) 9(3.25,1.15) 10(2.75,1.15) 11(2.25,1.15) 12(1.75,1.15) 13(1.25,1.15) 14(0.75,1.15) 15(0.25,1.15) 16(-0.25,1.15) 17(-0.75,1.15) 18(-1.25,1.15) 19(-1.75,1.15) 20(-2.25,1.15) 21(-2.75,1.15) 22(-3.25,1.15) 23(-3.75,1.15) 24(-4.25,1.15) 25(-4.75,1.15) 26(-5.25,1.15) 27(-5.75,1.15) 28(-6.25,1.15) 29(-6.75,1.15) 30(-7.25,1.15)
  rect 0.4x0.8 smd: 31(8.25,-1.35) 32(-8.25,-1.35)
  silkscreen extent -8.5,-1.9 8.5,2.5, body extent -8.5,-1.9 8.5,1.9, height 1
FP-711AJ-MFG [mm]
  round 0.234 smd paste+0 mask+0: 1(-0.325,-0.47) 2(0.325,-0.47)
  round 0.223 smd paste+0 mask+0: 3(0.325,0.405) 4(-0.325,0.405)
  rect 0.52x0.52 smd rot 135 paste+0 mask+0: 5(0,0)
  Top Layer region: -0.455,0.6 -0.455,0.21 -0.345,0.21 -0.195,0.36 -0.195,0.6
  Top Layer region: 0.455,0.6 0.455,0.21 0.345,0.21 0.195,0.36 0.195,0.6
  Top Layer region: 0.455,-0.6 0.455,-0.21 0.345,-0.21 0.195,-0.36 0.195,-0.6
  Top Layer region: -0.455,-0.6 -0.455,-0.21 -0.345,-0.21 -0.195,-0.36 -0.195,-0.6
  silkscreen extent -0.9,-1.28 0.9,0.52, body extent -0.63,-0.7 0.63,0.7, height 0.25
FP-AF0201-IPC_A [mil]
  rect 21.82x18.22 smd paste+0 mask+0: 1(-13.95,0) 2(13.95,0)
  silkscreen extent -25,-25 25,25, body extent -33,-17 33,17, height 10
FP-AF0201-MFG [mm]
  rect 0.35x0.4 smd paste+0 mask+0: 1(-0.325,0) 2(0.325,0)
  silkscreen extent -0.31,-0.62 0.31,0.62, body extent -0.6,-0.3 0.6,0.3, height 0.25
FP-CC0603-DA-MFG [mm]
  rect 0.8x0.9 smd paste+0 mask+0: 1(-0.75,0) 2(0.75,0)
  silkscreen extent -0.85,-0.85 0.85,0.85, body extent -1.35,-0.75 1.35,0.75, height 0.25
FP-CGA3E-0_3-0_1-IPC_B [mm]
  rect 0.756x1.106 smd paste+0 mask+0: 1(-0.925,0) 2(0.925,0)
  silkscreen extent -0.25,-0.55 0.25,0.55, body extent -1.55,-0.8 1.55,0.8, height 0.25
FP-CRCW0402-e3-MFG [mm]
  rect 0.6x0.6 smd paste+0 mask+0: 1(-0.525,0) 2(0.525,0)
  silkscreen extent -0.53,-0.7 0.52,0.7, body extent -0.92,-0.4 0.92,0.4, height 0.25
FP-DGN0008G-MFG [mm]
  rrect22% 1.4x0.45 smd paste+0 mask+0: 1(-2.2,0.975) 2(-2.2,0.325) 3(-2.2,-0.325) 4(-2.2,-0.975) 5(2.2,-0.975) 6(2.2,-0.325) 7(2.2,0.325) 8(2.2,0.975)
  rrect5% 2x3 smd paste-1000 mask-1000: 9(0,0)
  silkscreen extent -3.62,-1.88 1.55,1.88, body extent -3,-1.8 3,1.8, height 0.25
FP-GRM18-0_15-MFG [mm]
  rect 0.75x0.9 smd paste+0 mask+0: 1(-0.775,0) 2(0.775,0)
  silkscreen extent -0.88,-0.83 0.87,0.85, body extent -1.25,-0.58 1.25,0.58, height 0.25
FP-GRM033-0_03-IPC_C [mil]
  rect 13.94x10.34 smd paste+0 mask+0: 1(-10.01,0) 2(10.01,0)
  silkscreen extent -17,-22 17,22, body extent -21,-10 21,10, height 10
FP-GRM186-0_2-IPC_A [mil]
  rect 49.42x43.55 smd paste+0 mask+0: 1(-32.5,0) 2(32.5,0)
  silkscreen extent -57,-38 57,38, body extent -77,-41 77,41, height 10
FP-GRM186-0_2-IPC_B [mil]
  rect 41.54x39.61 smd paste+0 mask+0: 1(-28.56,0) 2(28.56,0)
  silkscreen extent -49,-36 49,36, body extent -59,-30 59,30, height 10
FP-IHLP-2525CZ-FP_2_413x3-MFG [mil]
  rect 95x135 smd paste+0 mask+0: 1(-115,0) 2(115,0)
  silkscreen extent -132,-132 132,132, body extent -166,-136 166,136, height 10
FP-RC0603-MFG [mm]
  rect 0.37x0.29 smd paste+0 mask+0: 1(-0.325,0) 2(0.325,0)
  silkscreen extent -0.32,-0.53 0.32,0.53, body extent -0.61,-0.27 0.61,0.27, height 0.25
FP-RMCF0201-IPC_A [mil]
  rect 21.82x18.22 smd paste+0 mask+0: 1(-13.95,0) 2(13.95,0)
  silkscreen extent -25,-25 25,25, body extent -33,-17 33,17, height 10
FP-RMCF0201-IPC_C [mil]
  rect 13.94x10.34 smd paste+0 mask+0: 1(-10.01,0) 2(10.01,0)
  silkscreen extent -17,-22 17,22, body extent -21,-10 21,10, height 10
FP-RMCF0201-MFG [mm]
  rect 0.35x0.4 smd paste+0 mask+0: 1(-0.325,0) 2(0.325,0)
  silkscreen extent -0.31,-0.58 0.31,0.58, body extent -0.6,-0.3 0.6,0.3, height 0.25
FP-RT0201-IPC_C [mil]
  rect 13.94x10.34 smd paste+0 mask+0: 1(-10.01,0) 2(10.01,0)
  silkscreen extent -17,-22 17,22, body extent -21,-10 21,10, height 10
FP-RT0201-MFG [mm]
  rect 0.35x0.4 smd paste+0 mask+0: 1(-0.325,0) 2(0.325,0)
  silkscreen extent -0.31,-0.57 0.31,0.58, body extent -0.6,-0.3 0.6,0.3, height 0.25
NB679GD-Z-Footprint-1 [mm]
  rrect40% 1.4x0.25 smd paste-2 mask+0: 1(-0.627,0.627) 2(-0.627,-0.373) 7(0.373,0.127)
  rrect40% 0.25x0.6 smd paste-1 mask+0: 3(-0.877,-1.273) 4(-0.377,-1.273) 5(0.123,-1.273) 6(0.623,-1.273) 9(0.623,1.527) 10(0.123,1.527) 11(-0.377,1.527) 12(-0.877,1.527)
  rrect40% 0.6x0.25 smd paste-1 mask+0: 8(0.773,0.627)
  silkscreen extent -2.05,0.53 -1.85,0.73, body extent -1.14,-1.4 0.89,1.65, height 0.38
NB680GD-Z-Footprint-1 [mm]
  rect 0.79x0.22 smd paste+0 mask+0.05: 1(-0.97,0.6) 2(-0.97,0.2) 3(-0.97,-0.2) 4(-0.97,-0.6) 7(0.97,-0.6) 8(0.97,-0.2) 9(0.97,0.2) 10(0.97,0.6)
  rect 0.22x0.79 smd paste+0 mask+0.05: 5(-0.2,-0.97) 6(0.2,-0.97) 11(0.2,0.97) 12(-0.2,0.97)
  rect 0.7x0.7 smd paste+0 mask+0.05: 13(0,0)
  silkscreen extent -2.06,-1.03 1,1.03, body extent -1,-1 1,1, height 1
QFN-12_MP8756_MNP [mm]
  rect 1.5x0.25 smd paste+0 mask+0: 1(-0.55,0.5) 2(-0.55,-0.5) 7(0.55,0)
  rect 0.25x0.7 smd paste+0 mask+0: 3(-0.75,-1.45) 4(-0.25,-1.45) 5(0.25,-1.45) 6(0.75,-1.45) 9(0.75,1.45) 10(0.25,1.45) 11(-0.25,1.45) 12(-0.75,1.45)
  rect 0.7x0.25 smd paste+0 mask+0: 8(0.95,0.5)
  silkscreen extent 1.18,-0.97 1.18,-0.46
RESC0201(0603)_L [mm] "Chip Resistor, Body 0.6x0.3mm, IPC High Density"
  rect 0.35x0.35 smd: 1(-0.3,0) 2(0.3,0)
  body extent -0.31,-0.16 0.31,0.16, height 0.3
RESC0201(0603)_M [mm] "Chip Resistor, Body 0.6x0.3mm, IPC Low Density"
  rect 0.55x0.55 smd: 1(-0.4,0) 2(0.4,0)
  body extent -0.31,-0.16 0.31,0.16, height 0.3
RESC0402(1005)_L [mm] "Chip Resistor, Body 1.0x0.5mm, IPC High Density"
  rrect25% 0.5x0.55 smd: 1(-0.45,0) 2(0.45,0)
  silkscreen extent 0,-0.2 0,0.2, body extent -0.5,-0.25 0.5,0.25, height 0.3
RESC0603X26X15LL03T05 [mm] "Chip Resistor, 2-Leads, Body 0.60x0.30mm, IPC High Density"
  rect 0.35x0.25 smd: 1(-0.275,0) 2(0.275,0)
  body extent -0.32,-0.16 0.31,0.17, height 0.26
RESC0603X26X15ML03T05 [mm] "Chip Resistor, 2-Leads, Body 0.60x0.30mm, IPC Low Density"
  rect 0.55x0.45 smd: 1(-0.375,0) 2(0.375,0)
  body extent -0.32,-0.16 0.32,0.17, height 0.26
RESC0603X26X15NL03T05 [mm] "Chip Resistor, 2-Leads, Body 0.60x0.30mm, IPC Medium Density"
  rect 0.45x0.35 smd: 1(-0.325,0) 2(0.325,0)
  body extent -0.32,-0.16 0.32,0.17, height 0.26
RESC0603X28X15LL05T05 [mm] "Chip Resistor, 2-Leads, Body 0.60x0.30mm, IPC High Density"
  rect 0.35x0.25 smd: 1(-0.275,0) 2(0.275,0)
  body extent -0.33,-0.17 0.32,0.18, height 0.28
RESC0603X28X15ML05T05 [mm] "Chip Resistor, 2-Leads, Body 0.60x0.30mm, IPC Low Density"
  rect 0.55x0.45 smd: 1(-0.375,0) 2(0.375,0)
  body extent -0.33,-0.17 0.33,0.18, height 0.28
RESC0603X28X15NL05T05 [mm] "Chip Resistor, 2-Leads, Body 0.60x0.30mm, IPC Medium Density"
  rect 0.45x0.35 smd: 1(-0.325,0) 2(0.325,0)
  body extent -0.33,-0.17 0.33,0.18, height 0.28
SON127P750X265-8N [mm] "SON, 8-Leads, Body 5,10x7,50mm, Pitch 1,27mm, IPC Medium Density"
  rect 1.7x0.45 smd: 1(-3.28,1.905) 2(-3.28,0.635) 3(-3.28,-0.635) 4(-3.28,-1.905) 5(3.28,-1.905) 6(3.28,-0.635) 7(3.28,0.635) 8(3.28,1.905)
  rect 4x4 smd: 9(0,0)
  silkscreen extent -4.4,-2.7 3.95,2.75, body extent -3.8,-2.55 3.8,2.55, height 2.65
TRANS_SSM6J507NU,LF(T [mm]
  rect 0.425x0.4 smd: 1(-0.938,0.65) 2(-0.938,0) 3(-0.938,-0.65) 4(0.938,-0.65) 5(0.938,0) 6(0.938,0.65)
  rect 1.15x0.95 smd: 7(0,0.325)
  rect 0.75x0.3 smd: 8(0,-0.65)
  silkscreen extent -1.85,-1.16 1,1.16

## Part data
*1: library part CMP-019-00054-1, "Wide Vin 4.8-26V Low Iq High Current Fixed 3.3V-8A Synchronous Buck Converter with 100mA LDO", Max Operating Temperature=125°C, Max Supply Voltage=24V, Min Operating Temperature=-40°C
*2 *3 *4 *5: library part CMP-019-00056-1, "Switching Regulator, 3A, 1200kHz Switching Freq-Max, PDSO8", Max Operating Temperature=85°C, Max Supply Voltage=5.5V, Min Operating Temperature=-40°C
C1 C3 C14 C16 C26 C28 C49 C51 C68 C70 C89 C91: library part CMP-2000-05448-2, "CAP CER 10UF 10V X5R 0603", Capacitance=10uF, Manufacturer=Murata, Package=GRM18-0.15, Temperature="-55°C to +85°C", Temperature Characteristic=X5R, Temperature Coefficient=15%, Temperature Range High=+85°C, Temperature Range Low=-55°C, Tolerance=10%, Voltage Rating=10V, Automotive=No, Category=Cap, ComponentLink2Description=Datasheet, ComponentLink2URL=https://search.murata.co.jp/Ceramy/image/img/A01X/G101/ENG/GRM188R61A106KE69-01A.pdf, Device Class L1="Passive Components", Device Class L2=Capacitors, Device Class L3="Ceramic Capacitors", Digikey Description="CAP CER 10UF 10V X5R 0603", Height=0.95mm, Lead Free=Yes, Manufacturer Part Number=GRM188R61A106KE69D, Material=Ceramic, Mouser Description="Multilayer Ceramic Capacitors MLCC - SMD/SMT 0603 10uF 10volts X5R + - 10%", Octopart=https://octopart.com/grm188r61a106ke69d-murata-22851381, RoHS=TRUE
C2 C6 C9 C15 C20 C21 C27 C33 C50 C56 C69 C75 C90 C96: library part CMP-2006-01211-1, Manufacturer=Vitramon, Part Number=VJ0603Y104KXJAP
C4 C25: library part CMP-001-00098-1, "0603 1 uF 16 V ±20 % Tolerance X5R Surface Mount Multilayer Ceramic Capacitor", Case/Package=0603, Max Operating Temperature=85°C, Min Operating Temperature=-55°C, Tolerance=20%, Voltage Rating=16V, Mounting Technology="Surface Mount", Pins=2
C5: library part CMP-2006-01229-1, Manufacturer=Vitramon, Part Number=VJ0603Y102MXXAC
C7 C18 C29 C52 C71 C92: library part CMP-03422-000839-1, "CC0603 220 nF X5R 10.00% 50 V", Capacitance="220 nF", Manufacturer=YAGEO, Package=CC0603-DA, Temperature="-55°C to +125°C", Temperature Characteristic=X5R, Temperature Coefficient=15%, Temperature Range High=+125°C, Temperature Range Low=-55°C, Tolerance=0.1, Voltage="50 V", Automotive=No, Category=Cap, ComponentLink2Description=Datasheet, ComponentLink2URL=http://www.yageo.com/documents/recent/UPY-GPHC_X7R_6.3V-to-50V_18.pdf, Device Class L1="Passive Components", Device Class L2=Capacitors, Device Class L3="Ceramic Capacitors", Footprint Url=http://www.yageo.com/exep/pages/download/literatures/UPY-C_GEN_24.pdf, Height=0.9mm, Lead Free=Yes, Manufacturer Part Number=CC0603KRX5R9BB224, Material=Ceramic, Mouser Description="Surface Mount Ceramic Multilayer Capacitor 0.22uF 10% X5R 50V 0603 Paper T/R", Octopart=https://octopart.com/cc0603krx5r9bb224-yageo-90326743, RoHS=TRUE, Voltage Rating="50 V"
C8 C19: library part CMP-2006-04534-1, Manufacturer="AVX Interconnect / Elco", Part Number=0603YD105MAT2A
C10 C11 C22 C23 C24 C34 C35 C36 C57 C58 C76 C77 C78 C97 C98 C99: library part CMP-06035-038491-1, "Chip Multilayer Ceramic Capacitors for General Purpose, 0603, 22uF, X5R, 15%, 20%, 6.3V", Capacitance=22uF, Case Code (Imperial)=0603, Case Code (Metric)=1608, Dielectric=X5R, Max Operating Temperature=85°C, Min Operating Temperature=-55°C, Tolerance=20%, Voltage Rating=6.3V, Case/Package=0603, Length=0.063inch, Mount="Surface Mount", Packaging="Tape and Reel", Thickness=0.028inch, Voltage Rating (DC)=6.3V, Width=0.031inch
C12 C31 C38 C41 C44 C45 C48 C54 C67 C73 C82 C85 C86 C94 C103 C106 C107 C110 C113 C114: library part CMP-001-00001-6, "Chip Capacitor, 0.1 uF, +/- 5%, 16 V, 0402 (1005 Metric)", Capacitor Type=Ceramic, Case/Package=0402, Max Operating Temperature=125°C, Min Operating Temperature=-55°C, Tolerance=5%, Voltage Rating=16V, Mounting Technology=SM, Pins=2, RoHS Compliant=True
C13: library part CMP-001-00074-3, "Chip Capacitor, 10µF +/-40%, 6.3V, 0402, Thickness 0.6 mm", Case/Package=0402, Max Operating Temperature=85°C, Min Operating Temperature=-55°C, Tolerance=10%, Voltage Rating=6.3V, Mounting Technology=SMT, Pins=2
C17: library part CMP-2008-02938-1, Manufacturer="AVX Interconnect / Elco", Part Number=0402ZC101KAT2A
C30 C53 C72 C93: library part CMP-001-00008-6, "Chip Capacitor, 1 uF, +/- 10%, 6.3 V, 0402 (1005 Metric)", Capacitor Type=Ceramic, Case/Package=0402, Max Operating Temperature=85°C, Min Operating Temperature=-55°C, Tolerance=10%, Voltage Rating=6.3V, Mounting Technology=SM, Pins=2, RoHS Compliant=True
C32 C55 C74 C95: library part CMP-08246-002038-1, "Cap Ceramic 220pF 250V C0G 5% Pad SMD 0603 +125°C Automotive T/R"
C37 C79 C100: library part CMP-001-00071-4, "Chip Capacitor, 47nF +/-20%, 50V, 0402, Thickness 0.6 mm", Case/Package=0402, Max Operating Temperature=85°C, Min Operating Temperature=-55°C, Tolerance=20%, Voltage Rating=50V, Mounting Technology=SMT, Pins=2
C39 C80 C101 C108: library part CMP-06035-000754-1, "Chip Multilayer Ceramic Capacitors for General Purpose, 0201, 22pF, C0G, 30ppm/°C, 1%, 25V", Capacitance=22pF, Case Code (Imperial)=0201, Case Code (Metric)=0603, Dielectric=C0G, Max Operating Temperature=125°C, Min Operating Temperature=-55°C, Package Quantity=15000, Tolerance=1%, Voltage Rating=25V, Case/Package=0201, Height=0.3mm, Length=0.024inch, Mount="Surface Mount", Packaging="Tape and Reel", Termination=SMD/SMT, Thickness=0.013inch, Voltage Rating (DC)=25V, Width=0.012inch
C40 C42 C43 C81 C83 C84 C102 C104 C105 C109 C111 C112: library part CMP-001-00097-1, "6.3V 22uF X5R ±20% 0603 Multilayer Ceramic Capacitors MLCC - SMD/SMT ROHS", Case/Package=0603, Max Operating Temperature=85°C, Min Operating Temperature=-55°C, Tolerance=20%, Voltage Rating=6.3V, Mounting Technology="Surface Mount"
C46 C47 C65 C66 C87 C88: library part CMP-001-00076-4, "Chip Capacitor, 4.7µF +/-20%, 10V, 0603, Thickness 1 mm", Case/Package=0603, Max Operating Temperature=85°C, Min Operating Temperature=-55°C, Tolerance=10%, Voltage Rating=10V, Mounting Technology=SMT, Pins=2
C59 C60 C62: library part CMP-001-00081-4, "Chip Capacitor, 22µF +/-40%, 16V, 0805, Thickness 1.45 mm", Case/Package=0805, Max Operating Temperature=85°C, Min Operating Temperature=-55°C, Tolerance=5%, Voltage Rating=16V, Mounting Technology=SMT, Pins=2
C61 C63: library part CMP-001-00065-4, "Chip Capacitor, 100nF +/-20%, 25V, 0402, Thickness 0.6 mm", Case/Package=0402, Max Operating Temperature=85°C, Min Operating Temperature=-55°C, Tolerance=10%, Voltage Rating=25V, Mounting Technology=SMT, Pins=2
C64: library part CMP-001-00073-3, "Chip Capacitor, 22pF +/-10%, 50V, 0402, Thickness 0.6 mm", Case/Package=0402, Max Operating Temperature=85°C, Min Operating Temperature=-55°C, Tolerance=10%, Voltage Rating=50V, Mounting Technology=SMT, Pins=2
J?: library part CMP-002-00089-2, "30 Position FFC, FPC Connector Contacts, Top and Bottom 0.020\" (0.50mm) Surface Mount, Right Angle -55C ~ 105C,50V,0.5A", Manufacturer_Name=Hirose, Manufacturer_Part_Number=FH34SRJ-30S-0.5SH(99), Max Operating Temperature=105°C, Min Operating Temperature=-55°C, Mouser Part Number=798-FH34SRJ30S05SH99, Voltage Rating=50V, Connector Type=Receptacle, Datasheet Link=https://www.hirose.com/product/download/?distributor=digikey&type=2d&lang=en&num=FH34SRJ-30S-0.5SH(99), Design Item ID=FH34SRJ-30S-0.5SH_99_, Gender=Female, Geometry.Height=1.1mm, Mounting Technology="Surface Mount", Mouser Price/Stock=https://www.mouser.co.uk/ProductDetail/Hirose-Connector/FH34SRJ-30S-0.5SH99?qs=%252BAZVS4b%2FkgI%2FlSMlYGcT5g%3D%3D, Pins=30, Source=FH34SRJ-30S-0.5SH_99_.SchLib
L1 L2 L3 L5 L6 L8: library part CMP-2000-06441-2, "Commercial Inductors, High Saturation Series 1.5uH 9A 15mΩ 20%", Case Code (Imperial)=2525, Current Rating=9A, DC Resistance (DCR)=15mR, Inductance=1.5uH, Inductance Tolerance=20%, Max DC Current=18A, Max Operating Temperature=125°C, Min Operating Temperature=-55°C, Package Quantity=2000, Self Resonant Frequency=5MHz, Test Frequency=100kHz, Case/Package=2525, Contact Plating=Tin, Core Material=Metal, Depth=6.72mm, Height=3mm, Height - Seated (Max)=0.118inch, Lead Free="Lead Free", Length=7.24mm, Military Standard=Not, Mount="Surface Mount", Number of Pins=2, Packaging="Tape and Reel", Radiation Hardening=No, RMS Current (Irms)=9A, Saturation Current=18A, Shielding=Shielded, Termination=SMD/SMT, Tolerance=20%, Width=6.47mm
L4 L7 L9 L10: library part CMP-006-00023-1, "Inductor High Current Shielded Wirewound 1.5uH 20% 100KHz 9A 15mOhm DCR 2525 T/R", Case/Package=2525, Current Rating=9A, Max Operating Temperature=125°C, Min Operating Temperature=-55°C, Self Resonant Frequency=40MHz, Tolerance=20%, Max Current Rating=9A, Mounting Technology="Surface Mount", Pins=2